# Altium PCB GearBOX.PcbDoc
Units mm, origin at the board's own origin, x right, y up, seen from the top; angles counter-clockwise.
Board outline 46 x 68 mm, 2 copper layers (Top Layer, Bottom Layer), stack 1.18 mm thick; 22 components, 15 nets, 103 pads, 22 vias.
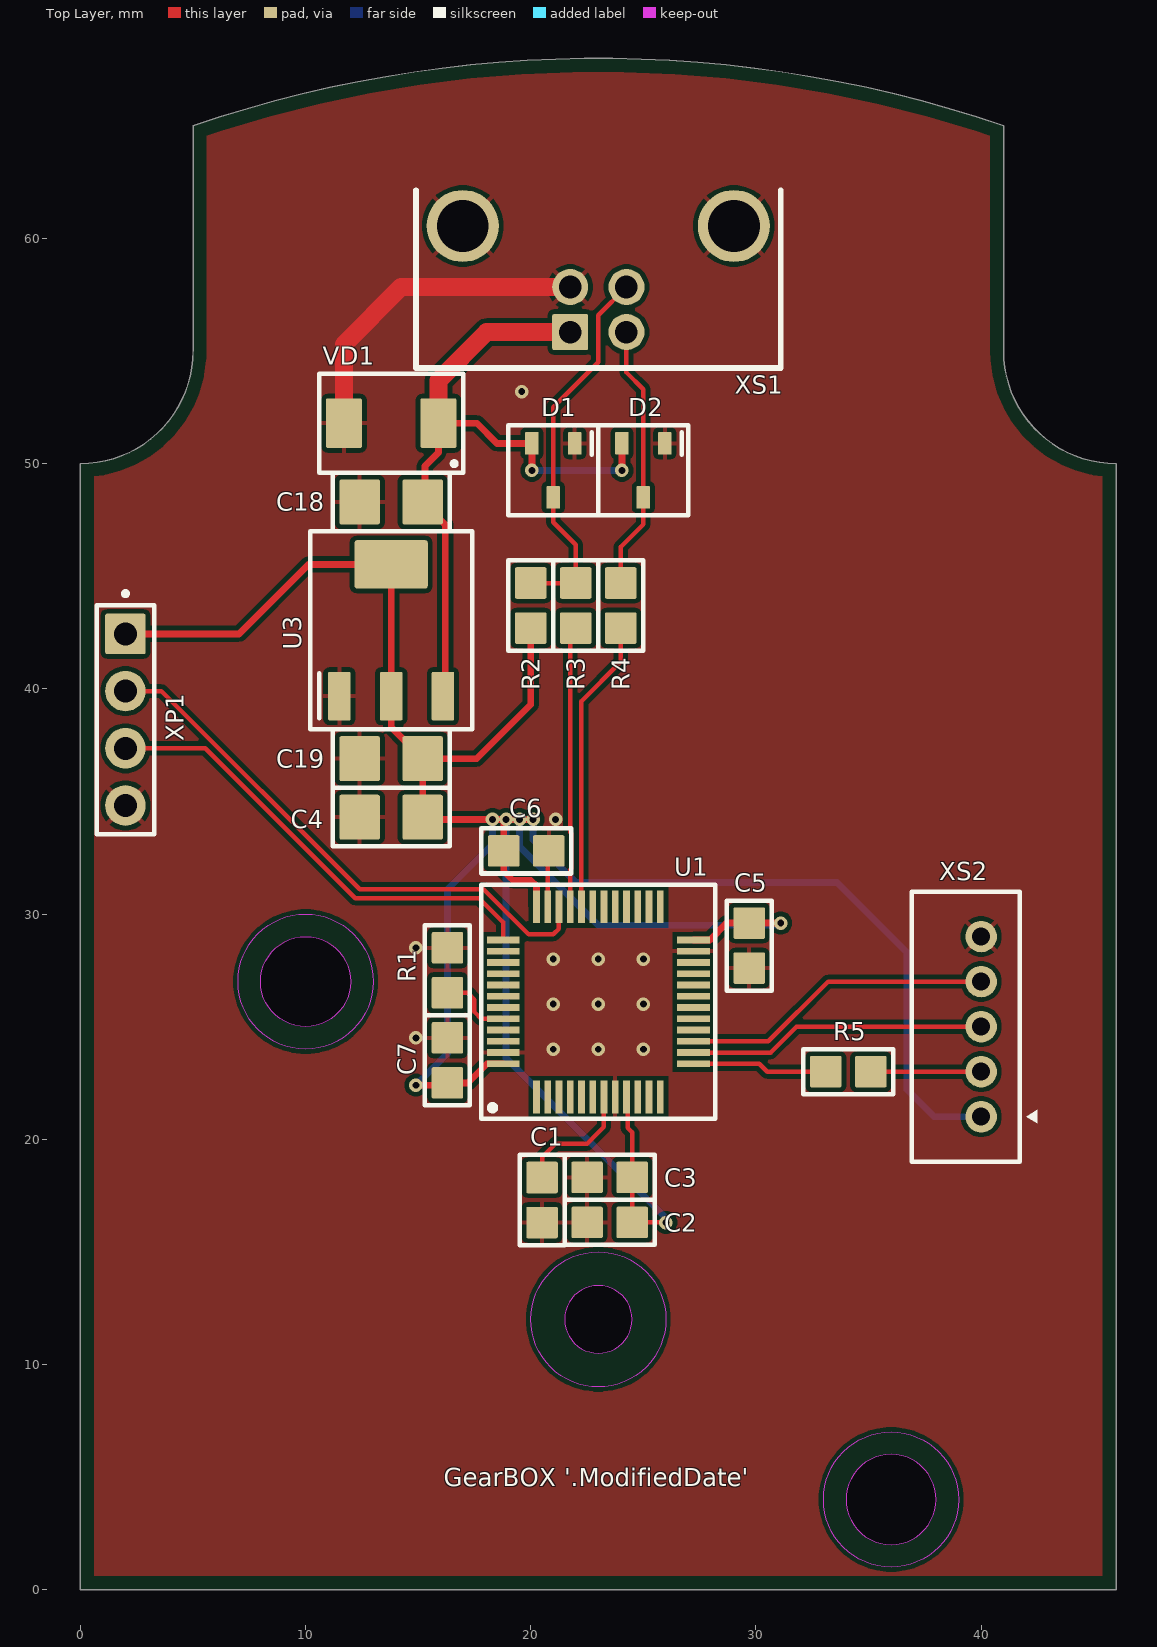
[diagram p0: Top Layer view]
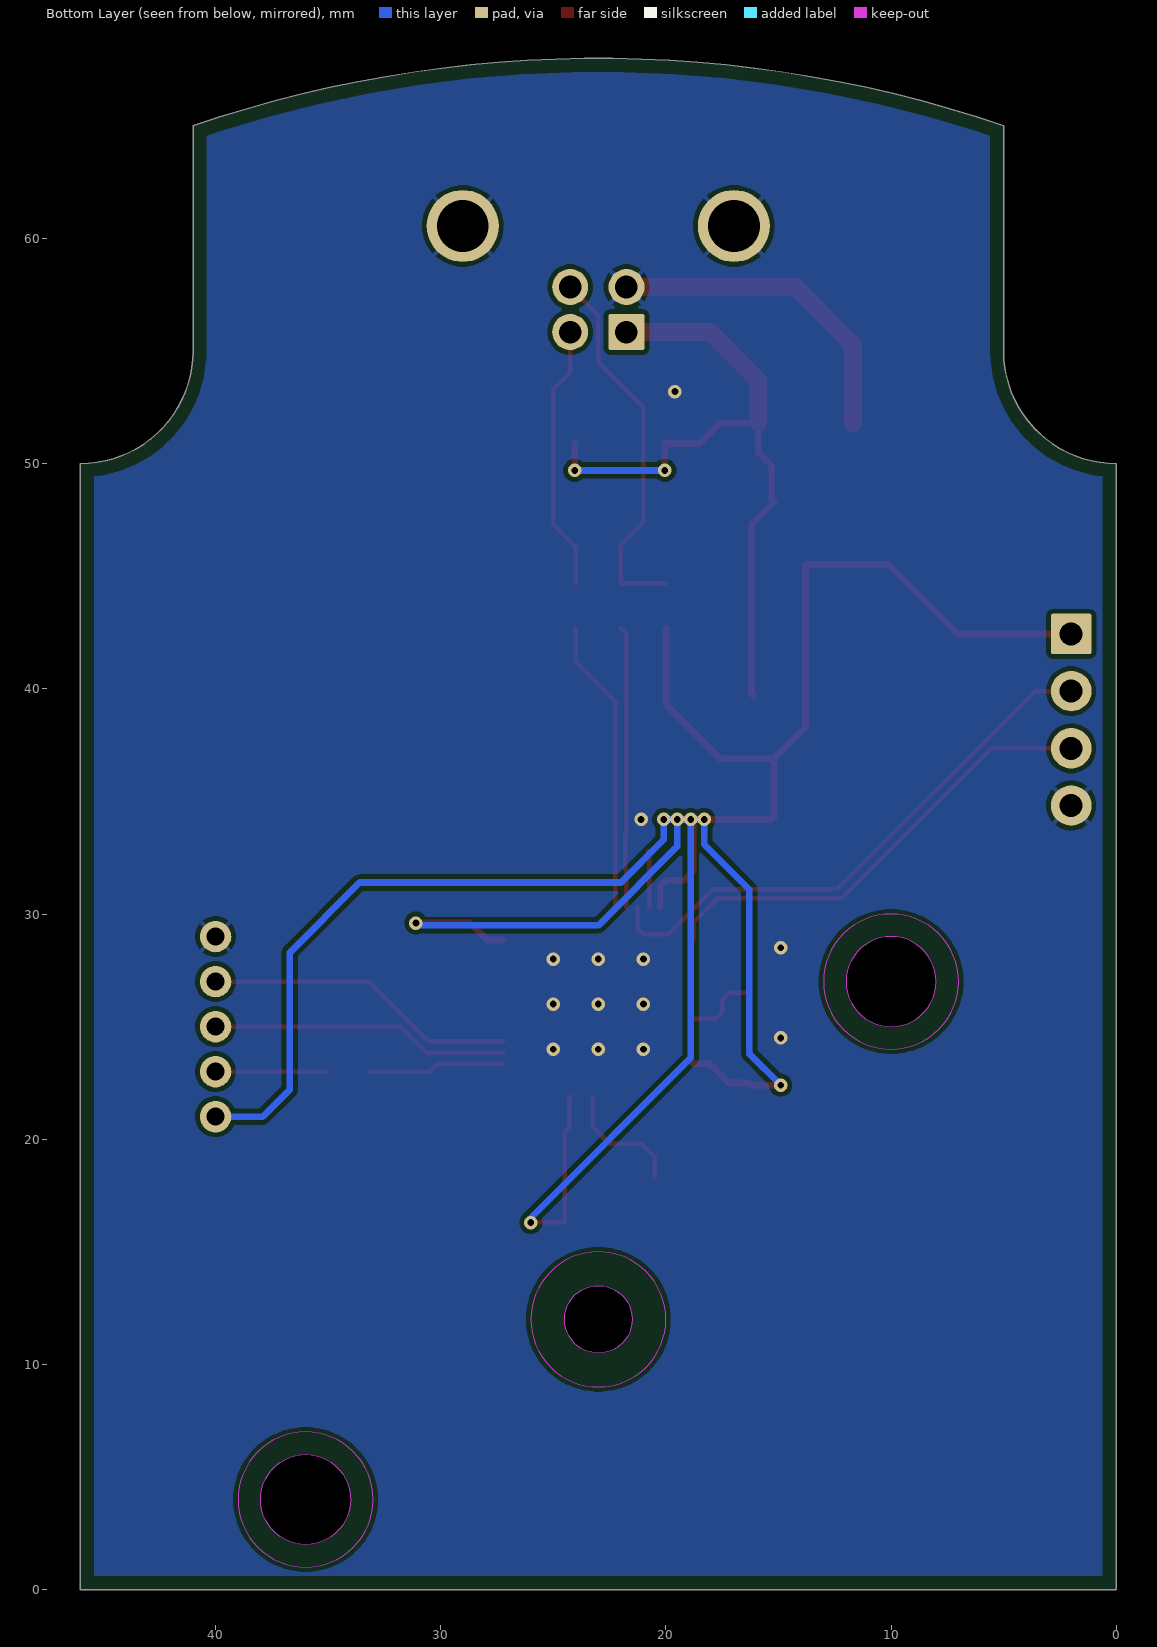
[diagram p1: Bottom Layer view, seen from below]
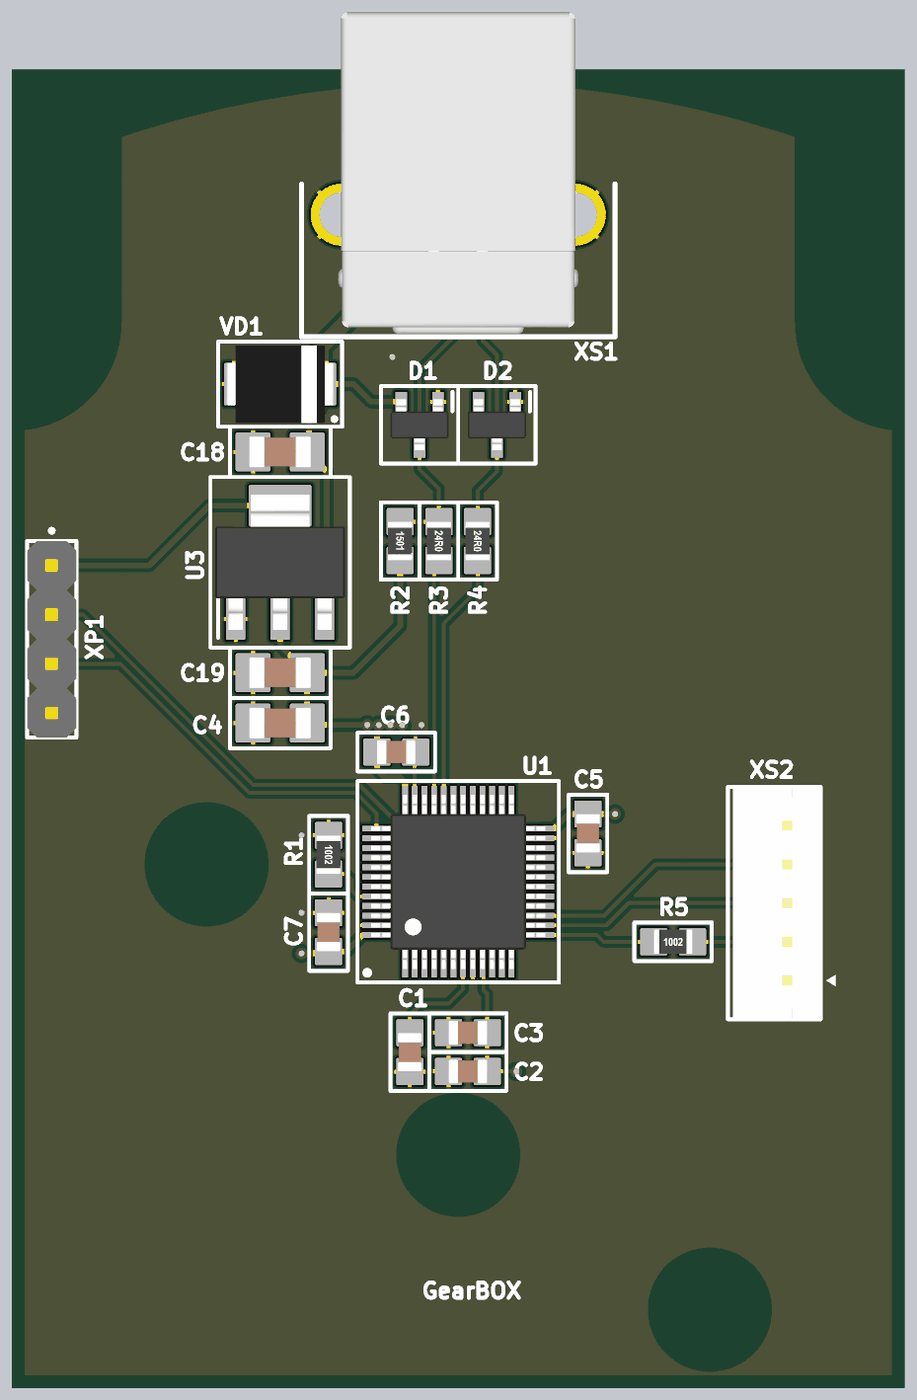
[diagram p2: 3D render of the assembled board from above, using the file's embedded part models]

## Layer stack, top to bottom
Top Solder: solder mask 0.0102, Solder Resist, Dk 3.5
Top Layer: signal copper 0.0175
Dielectric 1: core 1.145, FR4 (IPC-4101/21), Dk 4.6
Bottom Layer: signal copper 0.0175
Bottom Solder: solder mask 0.0102, Solder Resist, Dk 3.5

## Board outline
0,0 0,50 ccw(c0,55) 5,55 5,65 cw(c23,12.5) 41,65 41,55 ccw(c46,55) 46,50 46,0
cut-out: 34,4 ccw(c36,4) 36,2 ccw(c36,4) 38,4 ccw(c36,4) 36,6 ccw(c36,4)
cut-out: 21.5,12 ccw(c23,12) 23,10.5 ccw(c23,12) 24.5,12 ccw(c23,12) 23,13.5 ccw(c23,12)
cut-out: 10,25 cw(c10,27) 8,27 cw(c10,27) 10,29 cw(c10,27) 12,27 cw(c10,27)

## Design rules (kind name [scope] priority, off if disabled: settings)
AcuteAngle [All] p1: minimum=4.50000000000000E+0001 checktracksonly=TRUE
BoardOutlineClearance "NanoPi-NEO BoardOutlineClearance" [WithinRoom('NanoPi-NEO Board Room')] p1: gap=0.4 ignorepadtopadclearanceinfootprint=FALSE
BoardOutlineClearance [All] p2: gap=0.6 ignorepadtopadclearanceinfootprint=FALSE
Clearance [All] p1: gap=0.2 ignorepadtopadclearanceinfootprint=FALSE
ComponentClearance [All] p1: gap=-0.2 collisioncheckmode=3 verticalgap=0.2 showdistances=FALSE
Height "NanoPi-NEO Connector Avoid" [(WithinRoom('NanoPi-NEO Ethernet Room')or WithinRoom('NanoPi-NEO USB Room')) and OnTopLayer] p1: minheight=0 maxheight=1.2 prefheight=1
Height "NanoPi-NEO Board Avoid" [WithinRoom('NanoPi-NEO Board Room') and OnTopLayer] p2: minheight=0 maxheight=13.5 prefheight=13
Height "Height Top" [OnTop] p3: minheight=0 maxheight=20 prefheight=20
Height "Height Bottom" [OnBottom] p4: minheight=0 maxheight=3 prefheight=3
HoleSize [All] p1: absolutevalues=TRUE maxlimit=2539.975 minlimit=0.3 maxpercent=80.000 minpercent=20.000
HoleToHoleClearance [All] p1: gap=0.2 allowstackedmicrovias=TRUE
MinimumSolderMaskSliver MinimumSolderMaskSliver_1 [WithinRoom('ChargerRoom')] p1: minsoldermaskwidth=0.1
MinimumSolderMaskSliver [All] p2: minsoldermaskwidth=0.1
PolygonConnect [All] p1: thpad.connectstyle=Relief thpad.reliefconductorwidth=0.2 thpad.reliefentries=4 thpad.polygonreliefangle="45 Angle" thpad.airgapwidth=0.2 smdpad.connectstyle=Relief smdpad.reliefconductorwidth=0.2 smdpad.reliefentries=4 smdpad.polygonreliefangle="90 Angle" smdpad.airgapwidth=0.2 via.connectstyle=Direct via.reliefconductorwidth=0.254 via.reliefentries=4 via.polygonreliefangle="90 Angle" via.airgapwidth=0.254
RoutingVias [All] p1: holewidth=0.3 width=0.6 viastyle="Through Hole" minholewidth=0.3 minwidth=0.6 maxholewidth=1 maxwidth=2
SilkToSilkClearance [All] p1: silktosilkclearance=-100
SilkToSolderMaskClearance [IsPad] p1: minsilkscreentomaskgap=0 clearancetoexposedcopper=TRUE
SolderMaskExpansion ViaTent [IsVia] p1: expansion=0.102 istentingtop=TRUE
SolderMaskExpansion SolderMaskExpansion_1 [WithinRoom('ChargerRoom')] p2: expansion=0.05 istentingtop=FALSE
SolderMaskExpansion [All] p3: expansion=0.102 istentingtop=FALSE
Width [All] p1: maxlimit=10 minlimit=0.2 preferedwidth=0.2
23 further rules are at their usual default settings.

## Classes and differential pairs
component class USB: D1 D2 R2 R3 R4 VD1 XS1
component class U_Connector: R5 XS2
component class MCU: C1 C2 C3 C4 C5 C6 C7 R1 U1 XP1
component class SUPPLY_DC3V3: C18 C19 U3

## Components (designator, comment, footprint, x,y, rotation, side; value= is the part's Value field where it differs from the comment)
C1 "CL21B104MBFNNNE" Normal_Capacitor_Standard_0805-L2000-W1250-BW500-H1350 20.5,17.3 r90 top value=100N/X7R/50V/±20%
C2 "CL21B105MBFNNNE" Normal_Capacitor_Standard_0805-L2000-W1250-BW500-H1350 23.5,16.305 r0 top value=1U/X7R/50V/±20%
C3 "CL21B104MBFNNNE" Normal_Capacitor_Standard_0805-L2000-W1250-BW500-H1350 23.5,18.305 r0 top value=100N/X7R/50V/±20%
C4 "CL31B475KBHNNNE" Normal_Capacitor_Standard_1206-L3200-W1600-BW1250-H1600 13.8,34.3 r0 top value=4U7/X7R/50V/±10%
C5 "CL21B104MBFNNNE" Normal_Capacitor_Standard_0805-L2000-W1250-BW500-H1350 29.7,28.6 r90 top value=100N/X7R/50V/±20%
C6 "CL21B104MBFNNNE" Normal_Capacitor_Standard_0805-L2000-W1250-BW500-H1350 19.8,32.8 r180 top value=100N/X7R/50V/±20%
C7 "CL21B104MBFNNNE" Normal_Capacitor_Standard_0805-L2000-W1250-BW500-H1350 16.3,23.5 r270 top value=100N/X7R/50V/±20%
C18 "CL31B106KBHNNNE" Normal_Capacitor_Standard_1206-L3200-W1600-BW1250-H1600 13.8,48.3 r0 top value=10U/X7R/50V/±10%
C19 "CL31B106KBHNNNE" Normal_Capacitor_Standard_1206-L3200-W1600-BW1250-H1600 13.8,36.9 r0 top value=10U/X7R/50V/±10%
D1 "BAV99L" 3-SOT23 21,49.7 r270 top
D2 "BAV99L" 3-SOT23 25,49.7 r270 top
R1 "CR0805-10K-1%" SMD_RES_0805-L2000-W1250-H500-M1002 16.3,27.5 r270 top value=10K/1%
R2 "CR0805-1K5-1%" SMD_RES_0805-L2000-W1250-H500-M1501 20,43.7 r270 top value=1K5/1%
R3 "CR0805-24R-1%" SMD_RES_0805-L2000-W1250-H500-M24R0 22,43.7 r270 top value=24R/1%
R4 "CR0805-24R-1%" SMD_RES_0805-L2000-W1250-H500-M24R0 24,43.7 r270 top value=24R/1%
R5 "CR0805-10K-1%" SMD_RES_0805-L2000-W1250-H500-M1002 34.1,23 r0 top value=10K/1%
U1 "GD32F303CGT6" 48-LQFP 23,26.1 r90 top
U3 "LM1117DT-3.3/NOPB" SOT223 13.8,42.6 r90 top
VD1 "SMBJ5.0A" 2-MOLDED-E4600-D4000-A2700-H5600-B2200 13.8,51.8 r180 top
XP1 "DS1021-1X04SF11-B" DS1021-1X04SF11-B 2,38.63 r270 top
XS1 "DS1099-WN0" DS1099 23,58.2 r180 top locked
XS2 "DS1066-05MVW6X" DS1066-05MVWXX 40,25 r90 top

## Footprints (in the part's own frame and the unit in brackets; to place one, negate y for a bottom-side part, rotate by r counter-clockwise, add the part's x,y. Pads: shape width x height; smd on the part's side, far side on the other; paste and mask are expansions set on the pad)
2-MOLDED-E4600-D4000-A2700-H5600-B2200 [mm]
  rrect10% 1.6x2.2 smd: 1(-2.1,0) 2(2.1,0)
  silkscreen extent -3.2,-2.2 3.2,2.2, body extent -2.8,-2 2.8,2, height 2.7
3-SOT23 [mm] "SOT23, 3-Leads, Body 2,90x2,37mm, Pitch 0,95mm, IPC Medium Density"
  rrect10% 1x0.6 smd: 1(-1.2,0.95) 2(-1.2,-0.95) 3(1.2,0)
  silkscreen extent -2,-2 2,2, body extent -1.32,-1.5 1.32,1.5, height 1.1
48-LQFP [mm] "TSQFP, 48-Leads, Body 7,00x7,00mm, Pitch 0,50mm, IPC Medium Density"
  rect 1.45x0.3 smd: 1(-4.225,2.75) 2(-4.225,2.25) 3(-4.225,1.75) 4(-4.225,1.25) 5(-4.225,0.75) 6(-4.225,0.25) 7(-4.225,-0.25) 8(-4.225,-0.75) 9(-4.225,-1.25) 10(-4.225,-1.75) 11(-4.225,-2.25) 12(-4.225,-2.75) 25(4.225,-2.75) 26(4.225,-2.25) 27(4.225,-1.75) 28(4.225,-1.25) 29(4.225,-0.75) 30(4.225,-0.25) 31(4.225,0.25) 32(4.225,0.75) 33(4.225,1.25) 34(4.225,1.75) 35(4.225,2.25) 36(4.225,2.75)
  rect 0.3x1.45 smd: 13(-2.75,-4.225) 14(-2.25,-4.225) 15(-1.75,-4.225) 16(-1.25,-4.225) 17(-0.75,-4.225) 18(-0.25,-4.225) 19(0.25,-4.225) 20(0.75,-4.225) 21(1.25,-4.225) 22(1.75,-4.225) 23(2.25,-4.225) 24(2.75,-4.225) 37(2.75,4.225) 38(2.25,4.225) 39(1.75,4.225) 40(1.25,4.225) 41(0.75,4.225) 42(0.25,4.225) 43(-0.25,4.225) 44(-0.75,4.225) 45(-1.25,4.225) 46(-1.75,4.225) 47(-2.25,4.225) 48(-2.75,4.225)
  silkscreen extent -5.2,-5.2 5.2,5.2, body extent -4.5,-4.5 4.5,4.5, height 1.6
DS1021-1X04SF11-B [mm] "2.54mm Pin Header V/T Type"
  rrect10% 1.8x1.8 hole 1.02: 1(-3.81,0)
  round 1.8 hole 1.02: 2(-1.27,0) 3(1.27,0) 4(3.81,0)
  silkscreen extent -5.7,-1.27 5.08,1.27, body extent -5.08,-1.27 5.08,1.27, height 8.6
DS1066-05MVWXX [mm] "PCB Connector 2.5mm XH Type"
  round 1.4 hole 0.8: 1(-4,0) 2(-2,0) 3(0,0) 4(2,0) 5(4,0)
  silkscreen extent -6,-2.5 6,3.08, body extent -5.95,-1.7 5.95,2.8, height 6
DS1099 [mm] "USB Type-B R/A DIP Type Connector"
  rrect10% 1.6x1.6 hole 1: 1(1.25,2.355)
  round 1.6 hole 1: 2(-1.25,2.355) 3(-1.25,0.355) 4(1.25,0.355)
  round 3.2 hole 2.3: SH(-6.02,-2.355) SH(6.02,-2.355)
  silkscreen extent -8.1,-3.94 8.1,3.96, body extent -6.2,-12.8 6.2,3.8, height 11.01
Normal_Capacitor_Standard_0805-L2000-W1250-BW500-H1350 [mm]
  rrect10% 1.4x1.4 smd: 1(-1,0) 2(1,0)
  silkscreen extent -2,-1 2,1, body extent -1,-0.63 1,0.63, height 1.35
Normal_Capacitor_Standard_1206-L3200-W1600-BW1250-H1600 [mm]
  rrect10% 1.8x2 smd: 1(-1.4,0) 2(1.4,0)
  silkscreen extent -2.6,-1.3 2.6,1.3, body extent -1.6,-0.8 1.6,0.8, height 1.6
SMD_RES_0805-L2000-W1250-H500-M24R0 [mm] "Chip Resistor, 2-Leads, Body 2.000x1.250x0.500mm, IPC Medium Density"
  rrect10% 1.4x1.4 smd: 1(-1,0) 2(1,0)
  silkscreen extent -2,-1 2,1, body extent -1,-0.63 1,0.63, height 0.5
SMD_RES_0805-L2000-W1250-H500-M1002 [mm] "Chip Resistor, 2-Leads, Body 2.000x1.250x0.500mm, IPC Medium Density"
  rrect10% 1.4x1.4 smd: 1(-1,0) 2(1,0)
  silkscreen extent -2,-1 2,1, body extent -1,-0.63 1,0.63, height 0.5
SMD_RES_0805-L2000-W1250-H500-M1501 [mm] "Chip Resistor, 2-Leads, Body 2.000x1.250x0.500mm, IPC Medium Density"
  rrect10% 1.4x1.4 smd: 1(-1,0) 2(1,0)
  silkscreen extent -2,-1 2,1, body extent -1,-0.63 1,0.63, height 0.5
SOT223 [mm] "SOT223, 4-Leads, Body 6,50x7,00mm (avg), Pitch 2,30mm, IPC Medium Density"
  rrect10% 2.15x1 smd: 1(-2.925,2.3) 2(-2.925,0) 3(-2.925,-2.3)
  rrect10% 2.15x3.25 smd: 4(2.925,0)
  silkscreen extent -4.4,-3.6 4.4,3.6, body extent -3.5,-3.35 3.5,3.35, height 1.8

## Part data
C1 C2 C3 C4 C5 C6 C7: "Ceramic Capacitor SMD 0805"
C18 C19: "Ceramic Capacitor SMD 1210"
D1 D2 VD1: "Single high-speed switching diodes, fabricated in planar technology, and encapsulated in small hermetically sealed glass SOD80C Surface-Mounted Device (SMD) packages."
R1 R2 R3 R4 R5: "Film resistor SMD 0805"
U1: "Medium-density performance line Arm®-based 32-bit MCU with 64 or 128 KB Flash, USB, CAN, 7 timers, 2 ADCs, 9 com. interfaces"
XS1: "USB Type-B R/A DIP Type Connector", Manufacturer="Connfly Electronic Co. Ltd"

## Via types
v1: diameter 0.6, hole 0.3, Top Layer to Bottom Layer, tented both sides, 22 vias

## Nets (pads, with @x,y where several pads share a name; then routed paths per layer and width w, separated by ;. In a path a pad name is that pad's centre, name@x,y a point inside that pad or via, vN(x,y) a via of type N, cw(c..) or ccw(c..) an arc to the next point about the centre after c; other vN are vias at no path point)
AXIS_X: U1.14 XS2.3 | length 13.3
  Top Layer w0.2: U1.14 30.65,23.85 31.8,25 XS2.3
AXIS_Y: U1.15 XS2.4 | length 13.9
  Top Layer w0.2: U1.15 30.55,24.35 33.2,27 XS2.4
BOOT0: R1.2 U1.44 | length 3.3
  Top Layer w0.2: R1.2 17.2,26.5 17.5,26.2 17.5,25.65 17.8,25.35 U1.44
BUTTON: R5.1 U1.13 | length 6
  Top Layer w0.2: U1.13 30.15,23.35 30.5,23 R5.1
DC3V3: C2.2 C3.2 C4.2 C5.2 C6.2 C7.2 C19.2 R2.2 U1.9 U1.24 U1.36 U1.48 U3.2 U3.4 XP1.1 XS2.1 | length 139.7
  Top Layer w0.2: U1.9 24.3,21.825 24.3,20.5 24.5,20.3 C3.2 ; C3.2@24.5,18.3 C2.2 25.995,16.305 v1(26,16.3)
  Top Layer w0.3: XP1.1 7.04,42.44 10.125,45.525 U3.4 U3.2 13.8,38.3 C19.2 ; v1(14.9,22.4) 16.2,22.4 C7.2 17.2,22.5 18.05,23.35 U1.48 ; R2.2 20,39.3 17.6,36.9 C19.2 ; v1(20.1,34.2) v1(19.5,34.2) v1(18.9,34.2) v1(18.3,34.2) ; U1.36 20.25,31.25 20,31.5 19.2,31.5 18.8,31.9 C6.2 18.8,34.2 v1(18.3,34.2) ; U1.24 27.95,28.85 28.7,29.6 C5.2 v1(31.1,29.6) ; C19.2 C4.2 15.3,34.2 v1(18.3,34.2)
  Bottom Layer w0.3: v1(14.9,22.4) 16.3,23.8 16.3,31.1 18.3,33.1 v1(18.3,34.2) v1(18.9,34.2) ; v1(26,16.3) 26,16.5 18.9,23.6 v1(18.9,34.2) ; v1(31.1,29.6) 31,29.5 23,29.5 19.5,33 v1(19.5,34.2) ; XS2.1 37.9,21 36.7,22.2 36.7,28.3 33.6,31.4 22,31.4 20.1,33.3 v1(20.1,34.2) v1(19.5,34.2) ; v1(18.9,34.2) v1(19.5,34.2)
DC5V: C18.2 D1.2 D2.2 U3.3 VD1.1 XS1.1 | length 32.4
  Top Layer w0.3: U3.3 16.2,39.775 16.2,47.3 C18.2 15.3,48.4 15.3,49.9 15.9,50.5 VD1.1 17.6,51.8 18.5,50.9 D1.2 v1(20.05,49.7) ; v1(24.05,49.7) D2.2
  Top Layer w0.8: VD1.1 15.9,53.7 18.045,55.845 XS1.1
  Bottom Layer w0.3: v1(20.05,49.7) v1(24.05,49.7)
GND: C1.1 C2.1 C3.1 C4.1 C5.1 C6.1 C7.1 C18.1 C19.1 D1.1 D2.1 R1.1 U1.8 U1.23 U1.35 U1.47 U3.1 VD1.2 XP1.4 XS1.4 XS1.SH XS2.5 | length 17.1
  Top Layer w0.2: U1.35 20.75,32.75 C6.1
  Top Layer w0.8: VD1.2 11.7,55.3 14.245,57.845 XS1.4
  other v1: 21,24 23,24 25,24 14.9,24.5 21,26 23,26 25,26 21,28 23,28 25,28 14.9,28.5 21.1,34.2 19.6,53.2
NetR5_2: R5.2 XS2.2 | length 4.9
  Top Layer w0.2: R5.2 XS2.2
NetU1_34: U1.34 XP1.2 | length 24.8
  Top Layer w0.2: XP1.2 3.6,39.9 12.4,31.1 17.9,31.1 19.9,29.1 21,29.1 21.25,29.35 U1.34
NetU1_37: U1.37 XP1.3 | length 20.8
  Top Layer w0.2: XP1.3 5.54,37.36 12.2,30.7 17.7,30.7 18.775,29.625 U1.37
NRST: C1.2 U1.7 | length 5.5
  Top Layer w0.2: C1.2 20.5,19.2 21.1,19.8 22.5,19.8 23.25,20.55 U1.7
USB_DM: D2.3 R4.1 XS1.2 | length 11.9
  Top Layer w0.2: R4.1 24,46.3 25,47.3 D2.3 25,53.3 24.25,54.05 XS1.2
USB_DM_P: R4.2 U1.32 | length 13.1
  Top Layer w0.2: U1.32 22.25,39.45 24,41.2 R4.2
USB_DP: D1.3 R2.1 R3.1 XS1.3 | length 16.9
  Top Layer w0.2: R2.1 R3.1 22,46.4 21,47.4 D1.3 21,52.5 23,54.5 23,56.595 XS1.3
USB_DP_P: R3.2 U1.33 | length 12.5
  Top Layer w0.2: U1.33 21.75,31.967 21.8,32.017 21.8,33.583 21.75,33.633 21.75,42.45 R3.2
pads on no net: U1.1 U1.2 U1.3 U1.4 U1.5 U1.6 U1.10 U1.11 U1.12 U1.16 U1.17 U1.18 U1.19 U1.20 U1.21 U1.22 U1.25 U1.26 U1.27 U1.28 U1.29 U1.30 U1.31 U1.38 U1.39 U1.40 U1.41 U1.42 U1.43 U1.45 U1.46

## Polygon pours and split planes (outlines as drawn)
GND on Top Layer "NONET_L-01_P-001" (solid, remove dead copper, pour order 0): 0,68 46,68 46,0 0,0
GND on Bottom Layer "NONET_L-01_P-001" (solid, remove dead copper, pour order 1): 0,68 46,68 46,0 0,0

## Keep-outs
Keep-Out Layer:
  region: 36,1 cw(c36,4) 33,4 cw(c36,4) 36,7 cw(c36,4) 39,4 cw(c36,4)
  region: 23,9 cw(c23,12) 20,12 cw(c23,12) 23,15 cw(c23,12) 26,12 cw(c23,12)
  region: 10,24 cw(c10,27) 7,27 cw(c10,27) 10,30 cw(c10,27) 13,27 cw(c10,27)

## Silkscreen, mask and mechanical layers (free items; w line width, h text height)
Top Overlay:
  text "GearBOX '.ModifiedDate'" at 16.136,4.6 h0.8
Board:
  lines w0.1: 0,0 46,0 46,50 cw(c46,55) 41,55 41,65 ccw(c23,12.5) 5,65 5,55 cw(c0,55) 0,50 0,0 ; 8,27 cw(c10,27) 10,29 cw(c10,27) 12,27 cw(c10,27) 10,25 cw(c10,27) 8,27 ; 21.5,12 cw(c23,12) 23,13.5 cw(c23,12) 24.5,12 cw(c23,12) 23,10.5 cw(c23,12) 21.5,12 ; 34,4 cw(c36,4) 36,6 cw(c36,4) 38,4 cw(c36,4) 36,2 cw(c36,4) 34,4
Board Shape:
  circle w0.1: c36,4 r3
  circle w0.1: c23,12 r3
  circle w0.1: c10,27 r3
  circle w0.05: c23,0 r0.025
  circle w0.1: c23,12 r1.5
  circle w0.1: c36,4 r2
  circle w0.1: c10,27 r2
  lines w0.1: 0,0 0,50 ccw(c0,55) 5,55 5,65 cw(c23,12.5) 41,65 41,55 ccw(c46,55) 46,50 46,0 0,0